# EAGLE board Ethernet_Module_r1 (EAGLE 7.7.0)
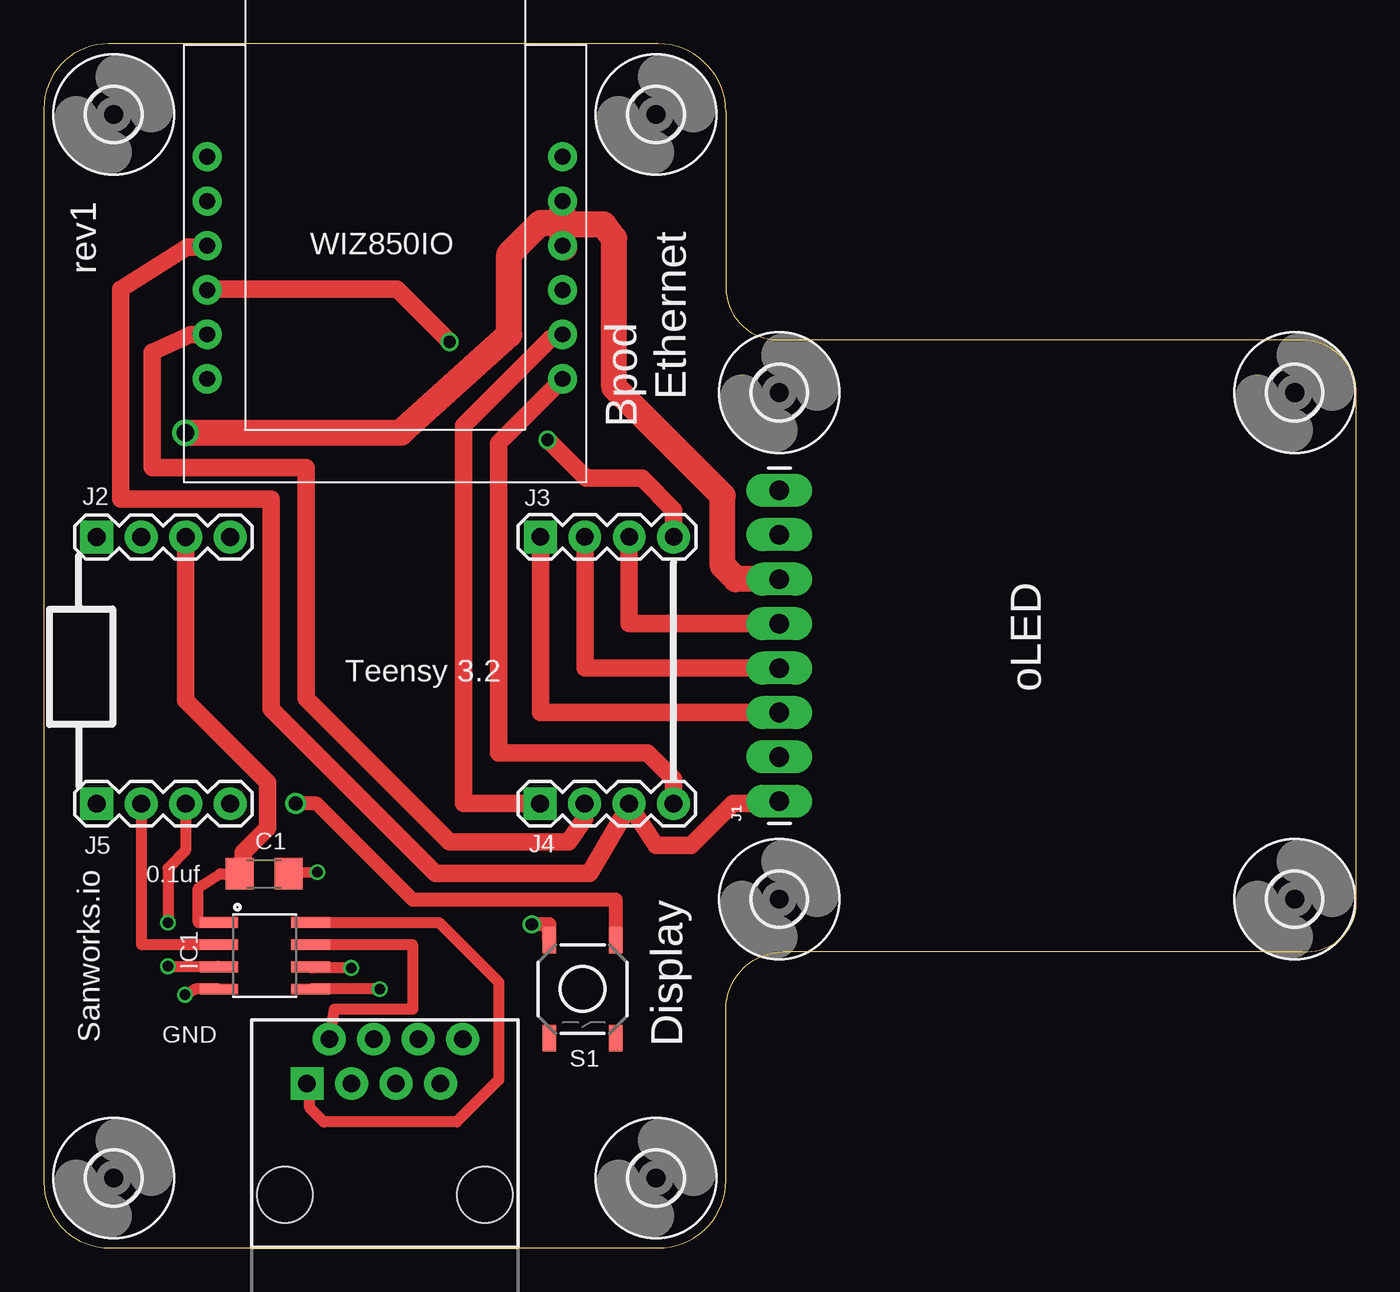
[diagram p0: board, top side]
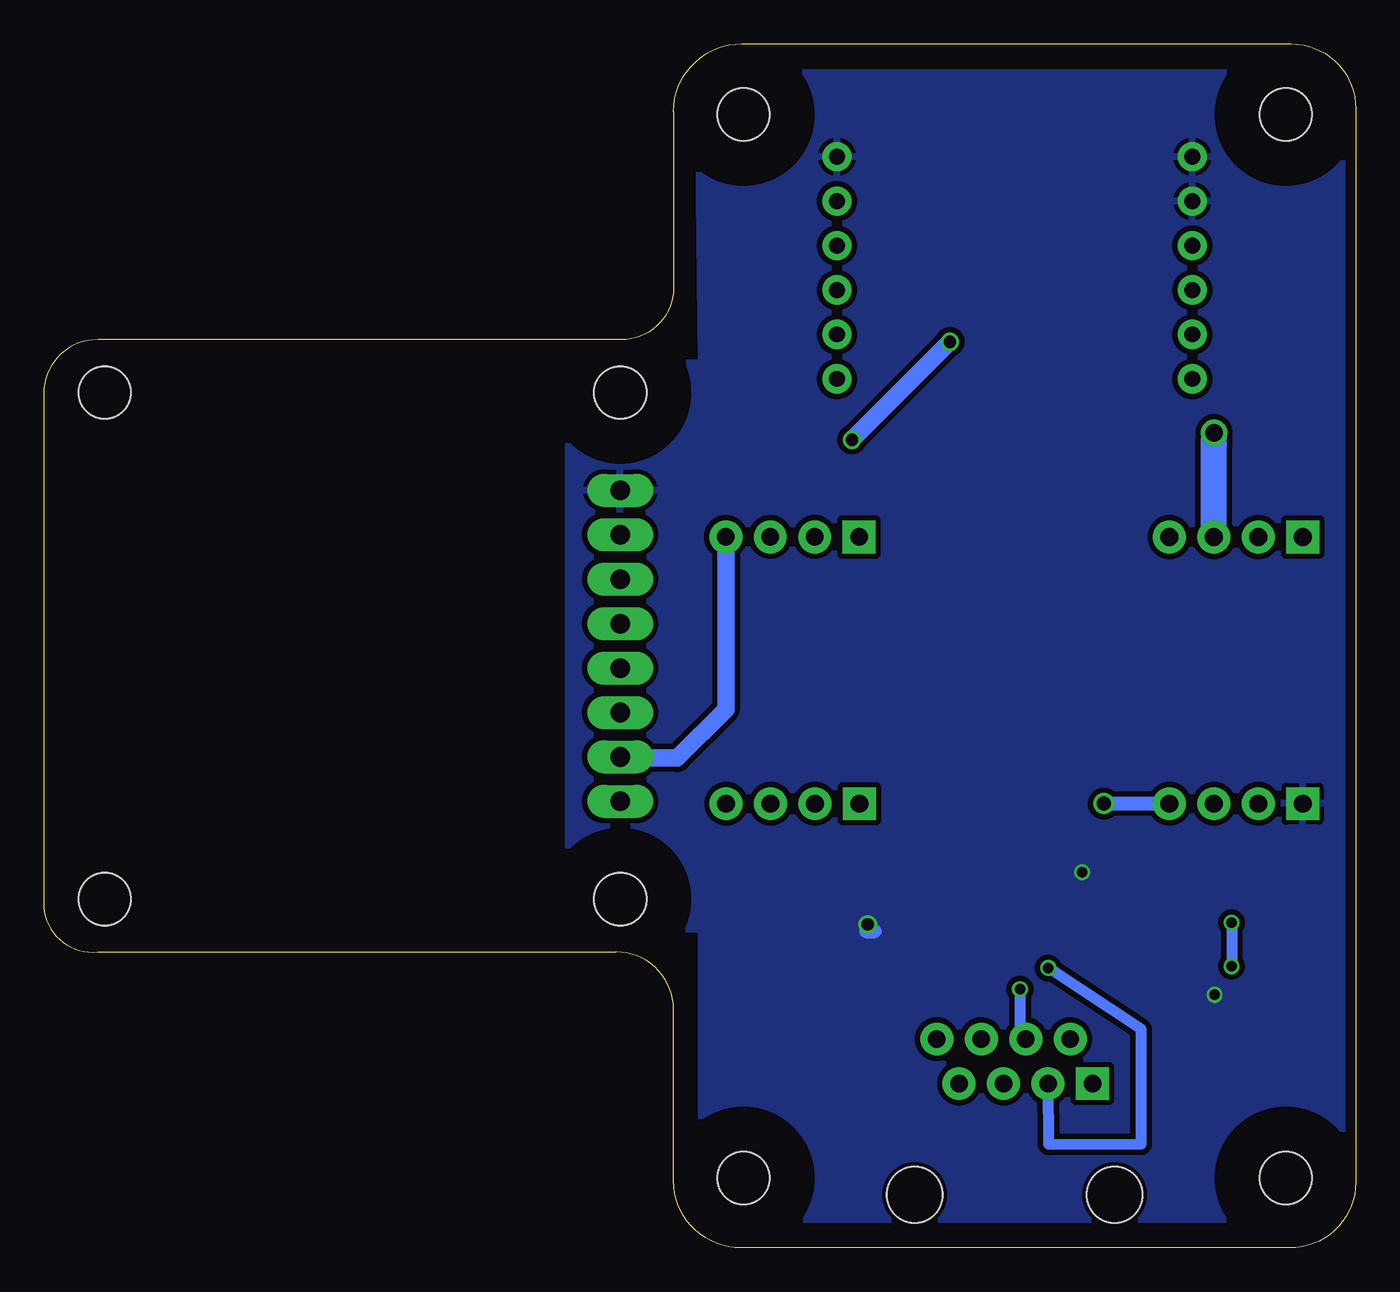
[diagram p1: board, bottom side, seen from below]

Size 75 x 68.84 mm. Coordinates in mm from the lower left corner, seen from the top.
Outline: 39,64.94 39,54.87 arc90 41.95,51.92 71.93,51.92 arc-90 75,48.85 75,19.46 arc-90 71.93,16.92 42.28,16.92 arc90 39,13.64 39,3.86 arc-90 35.14,0 3.77,0 arc-90 0,3.77 0,65.13 arc-90 3.71,68.84 35.1,68.84 arc-90 39,64.94
Copper layers (1*16): Top 0.035mm / dielectric 1.5mm / Bottom 0.035mm
Design rules "SeeedStudio_2layer_DRU_no_angle_20140221 *": minimum track width 6mil, minimum drill 12mil, track to track 12mil, track to pad 12mil, pad to pad 12mil, via to via 12mil, smd to smd 0mil, copper to edge 10mil, drill to drill 10mil, minimum pad ring 10mil, minimum via ring 6mil, stop-mask expansion 2mil, vias tented up to drill 100mil, thermal gap 10mil

## Footprints (pad centres in the part's own frame; a part is rotated, then mirrored left to right if it is on the bottom)
1206@1 = smd 1.6 x 1.8: 1 -1.4,0; 2 1.4,0
3,0 = hole 3: 0,0
SO08 = smd 0.61 x 2.21: 1 -1.905,-2.616; 2 -0.635,-2.616; 3 0.635,-2.616; 4 1.905,-2.616; 5 1.905,2.616; 6 0.635,2.616; 7 -0.635,2.616; 8 -1.905,2.616
1X08_LONGPADS = drill 1.118 pad 1.88 long: 1 0,0; 2 2.54,0; 3 5.08,0; 4 7.62,0; 5 10.16,0; 6 12.7,0; 7 15.24,0; 8 17.78,0
1X04 = drill 1.016 pad 1.88 square: 1 0,0 | drill 1.016 pad 1.88: 2 2.54,0; 3 5.08,0; 4 7.62,0
TACTILE_SWITCH_SMD_5.2MM = smd 1.524 x 0.762: 1 -2.794,1.905; 2 2.794,1.905; 3 -2.794,-1.905; 4 2.794,-1.905
RJ45-8 = drill 1 pad 1.88 square: 1 -4.445,6.35 | drill 1 pad 1.88: 2 -3.175,8.89; 3 -1.905,6.35; 4 -0.635,8.89; 5 0.635,6.35; 6 1.905,8.89; 7 3.175,6.35; 8 4.445,8.89 | hole 3.2: -5.715,0; 5.715,0
WIZ850IO = drill 0.9 pad 1.676: P$1 -10.16,5.08; P$2 -10.16,2.54; P$3 -10.16,0; P$4 -10.16,-2.54; P$5 -10.16,-5.08; P$6 -10.16,-7.62; P$7 10.16,-7.62; P$8 10.16,-5.08; P$9 10.16,-2.54; P$10 10.16,0; P$11 10.16,2.54; P$12 10.16,5.08

## Placement (x,y rotation side)
C1  0.1uf  [1206@1]  12.6,21.39 0 top
H1  MOUNT-HOLE3.0  [3,0]  4,4 0 top
H2  MOUNT-HOLE3.0  [3,0]  35,4 0 top
H3  MOUNT-HOLE3.0  [3,0]  35,64.8 0 top
H4  MOUNT-HOLE3.0  [3,0]  4,64.8 0 top
H5  MOUNT-HOLE3.0  [3,0]  42.05,48.9 0 top
H6  MOUNT-HOLE3.0  [3,0]  42.05,19.94 0 top
H7  MOUNT-HOLE3.0  [3,0]  71.51,48.9 0 top
H8  MOUNT-HOLE3.0  [3,0]  71.51,19.94 0 top
IC1  SN65HVD31DR  [SO08]  12.64,16.71 270 top
J1  [1X08_LONGPADS]  42.05,25.53 90 top
J2  [1X04]  3.03,40.64 0 top
J3  [1X04]  28.39,40.65 0 top
J4  [1X04]  28.38,25.4 0 top
J5  [1X04]  3.03,25.4 0 top
S1  MOMENTARY-SWITCH-SPST-SMD-5.2MM  [TACTILE_SWITCH_SMD_5.2MM]  30.8,14.8 270 top
U$1  RJ45-8PTH  [RJ45-8]  19.5,3.05 0 top
WIZ850IO  WIZ850IO  [WIZ850IO]  19.5,57.3 0 top

## Library data of the parts
C1 = SparkFun-Capacitors
H1-H8 = holes
IC1 = Joshparts4
J1 = SparkFun-Connectors
J2-J5 = SparkFun-Connectors; PROD_ID: CONN-09696
S1 = SparkFun-Switches; PROD_ID: SWCH-08247; SF_SKU: COM-08720
U$1 = SparkFun
WIZ850IO = JoshParts10

## Nets
DC: J1.3 J3.1
ETH_CS: J4.2 WIZ850IO.P$5
ETH_RST: J4.1 WIZ850IO.P$8
GND: C1.2 IC1.4 J1.8 J5.1 S1.3 WIZ850IO.P$1 WIZ850IO.P$2 WIZ850IO.P$12
MISO: J4.4 WIZ850IO.P$7
MOSI: J1.1 J4.3 WIZ850IO.P$3
N$1: J5.4 S1.1
N$7: IC1.8 U$1.1
N$8: IC1.7 U$1.2
N$9: IC1.6 U$1.3
N$10: IC1.5 U$1.4
OLED_CS: J1.5 J3.3
OLED_RST: J1.4 J3.2
RX1: IC1.2 J5.2
SCK: J1.2 J3.4 WIZ850IO.P$4
TX1: IC1.3 J5.3
VCC: C1.1 IC1.1 J1.6 J2.3 WIZ850IO.P$10 WIZ850IO.P$11

## Tracks (layer width: path | path; a pad name or v marks a point on that pad's centre or on a via)
DC
  Top 1: J3.1 28.39,30.61 J1.3
ETH_CS
  Top 1: J4.2 30.91,24.52 30,23.2 23.2,23.2 15,31.4 15,44.6 6.2,44.6 6.2,51.2 8.4,52.2 9.32,52.2 WIZ850IO.P$5
ETH_RST
  Top 1: J4.1 24,25.4 24,47 29,52 29.44,52 WIZ850IO.P$8
GND  (via drill 0.6, 0.7)
  Top 0.635: IC1.4 8.65,14.8 v8.07,14.48 | C1.2 14.34,21.48 v15.64,21.48
  Top 0.8: S1.3 28.89,18.5 v27.9,18.5
  Bottom 0.8: v27.9,18.5 28,18.1 27.5,18.1
  pour Bottom: 0.8,67.2 0.8,1.6 37.4,1.6 37.4,18.2 45,18.2 45,50.6 37.4,50.6 37.6,67.2
MISO
  Top 1: WIZ850IO.P$7 26,46.02 26,28.3 34.5,28.3 35.99,26.8 J4.4
MOSI
  Top 1: 33.45,25.34 35,23 37,23 39.4,25.4 41.92,25.4 J1.1 | J4.3 33.45,25.34 | 33.45,25.34 33.45,25.25 31.2,21.4 22.4,21.4 13,30.8 13,42.8 4.4,42.8 4.4,54.8 8.2,57.2 9.24,57.2 WIZ850IO.P$3
N$1  (via drill 0.8)
  Top 0.8: S1.1 32.7,19.9 21.1,19.9 15.6,25.4 v14.4,25.4
  Bottom 0.8: v14.4,25.4 J5.4
N$7
  Top 0.635: IC1.8 22.59,18.61 26,15.2 26,9.6 23.6,7.2 16,7.2 15.2,8 15.2,9.25 U$1.1
N$8
  Top 0.635: IC1.7 21.08,17.34 21.09,14.99 21.09,13.65 16.61,13.65 U$1.2
N$9  (via drill 0.6)
  Top 0.635: v17.58,16 15.32,16 IC1.6
  Bottom 0.635: U$1.3 17.57,5.93 12.26,5.95 12.26,12.48 v17.58,16
N$10  (via drill 0.6)
  Top 0.625: v19.2,14.8 IC1.5
  Bottom 0.635: v19.2,14.8 19.2,12.27 U$1.4
OLED_CS
  Top 1: J3.3 33.47,35.69 J1.5
OLED_RST
  Top 1: J3.2 30.93,33.15 J1.4
RX1
  Top 0.625: J5.2 5.57,17.34 IC1.2
SCK  (via drill 0.7)
  Top 1: J3.4 36.01,42.19 34.2,44 31,44 v28.8,46.2 | v23.2,51.8 20.2,54.8 9.38,54.8 WIZ850IO.P$4
  Bottom 0.6: 41.98,28 J1.2
  Bottom 1: J3.4 36.01,30.79 38.8,28 41.98,28 | v28.8,46.2 v23.2,51.8
TX1  (via drill 0.6)
  Top 0.625: J5.3 8.11,22.71 7.1,21.7 v7.1,18.6 | v7.1,16.1 9.95,16.1 IC1.3
  Bottom 0.625: v7.1,18.6 v7.1,16.1
VCC  (via drill 1)
  Top 0.635: IC1.1 8.83,18.61 8.83,20.57 10.1,21.39 C1.1
  Top 1: J2.3 8.11,31.29 12.8,26.6 12.8,24 11.4,22.6 11.4,21.6 C1.1
  Top 1.5: J1.6 39.57,38.23 38.8,39 38.8,43 32.6,49.2 32.6,57.7 32,58.5 29.66,58.5 | 29.76,57.2 WIZ850IO.P$10 29.66,58.5 | 29.66,58.5 29.66,58.6 | 29.66,58.6 WIZ850IO.P$11 | v8.1,46.6 20.4,46.6 26.6,52.2 26.6,56.8 28.4,58.6 29.66,58.6
  Bottom 1.5: J2.3 8.11,45.91 v8.1,46.6

## Text on the board
tPlace: rev1 | Ethernet | Bpod | Teensy 3.2 | oLED | Sanworks.io | 0.1uf | Display | GND